# EAGLE board Drive_unit (EAGLE 9.6.2)
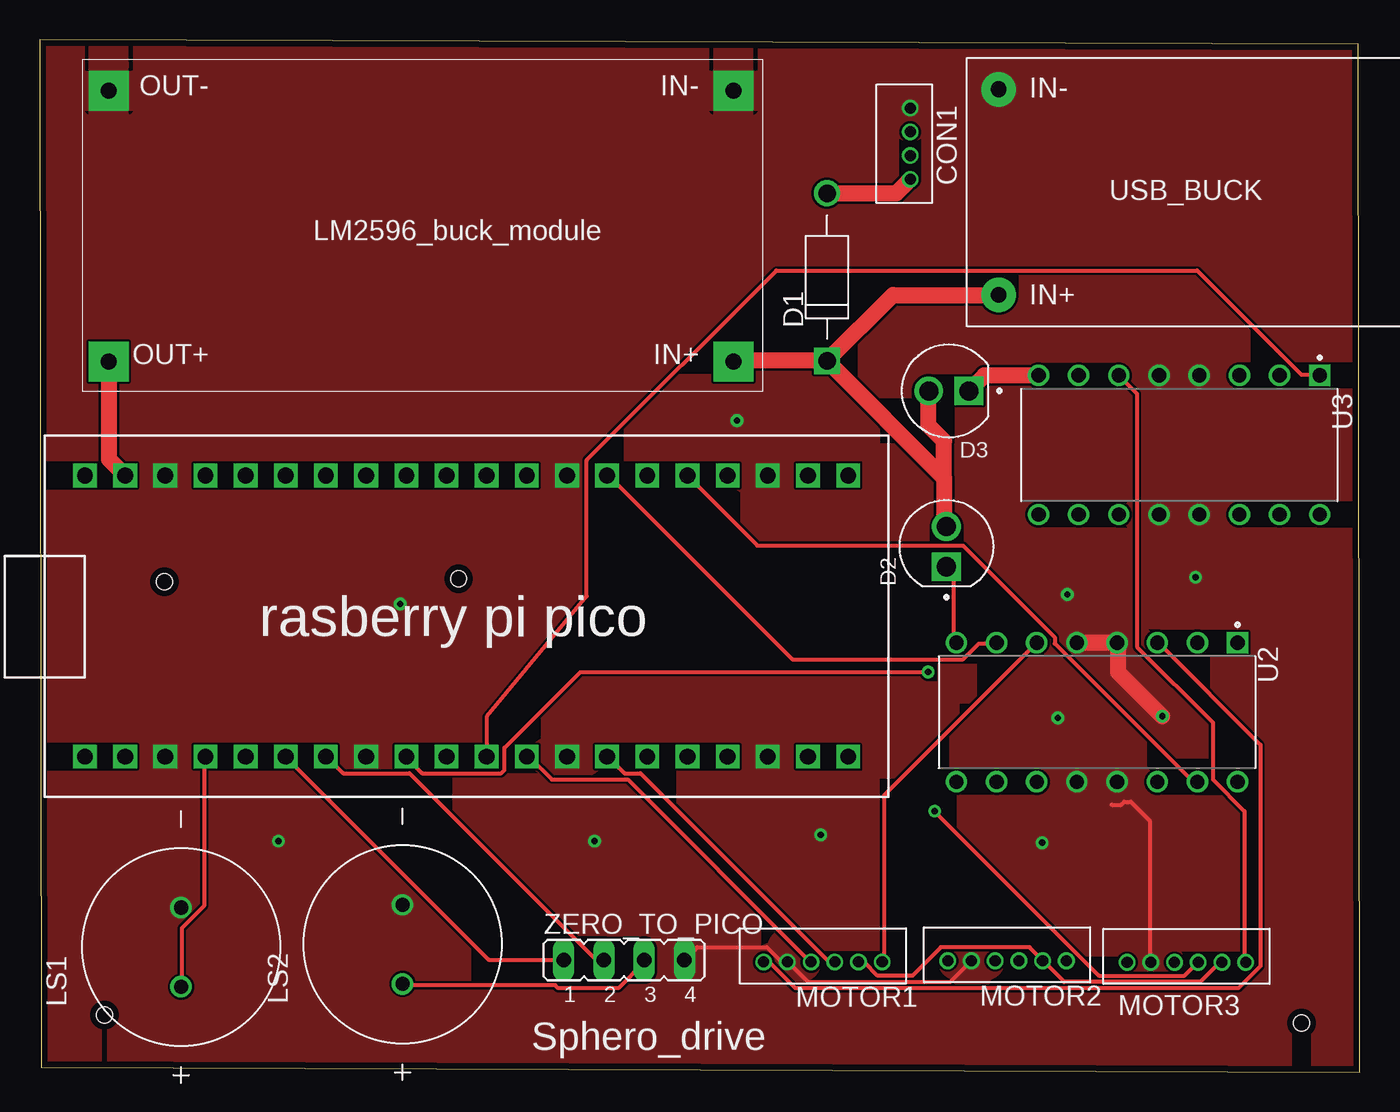
[diagram p0: board, top side]
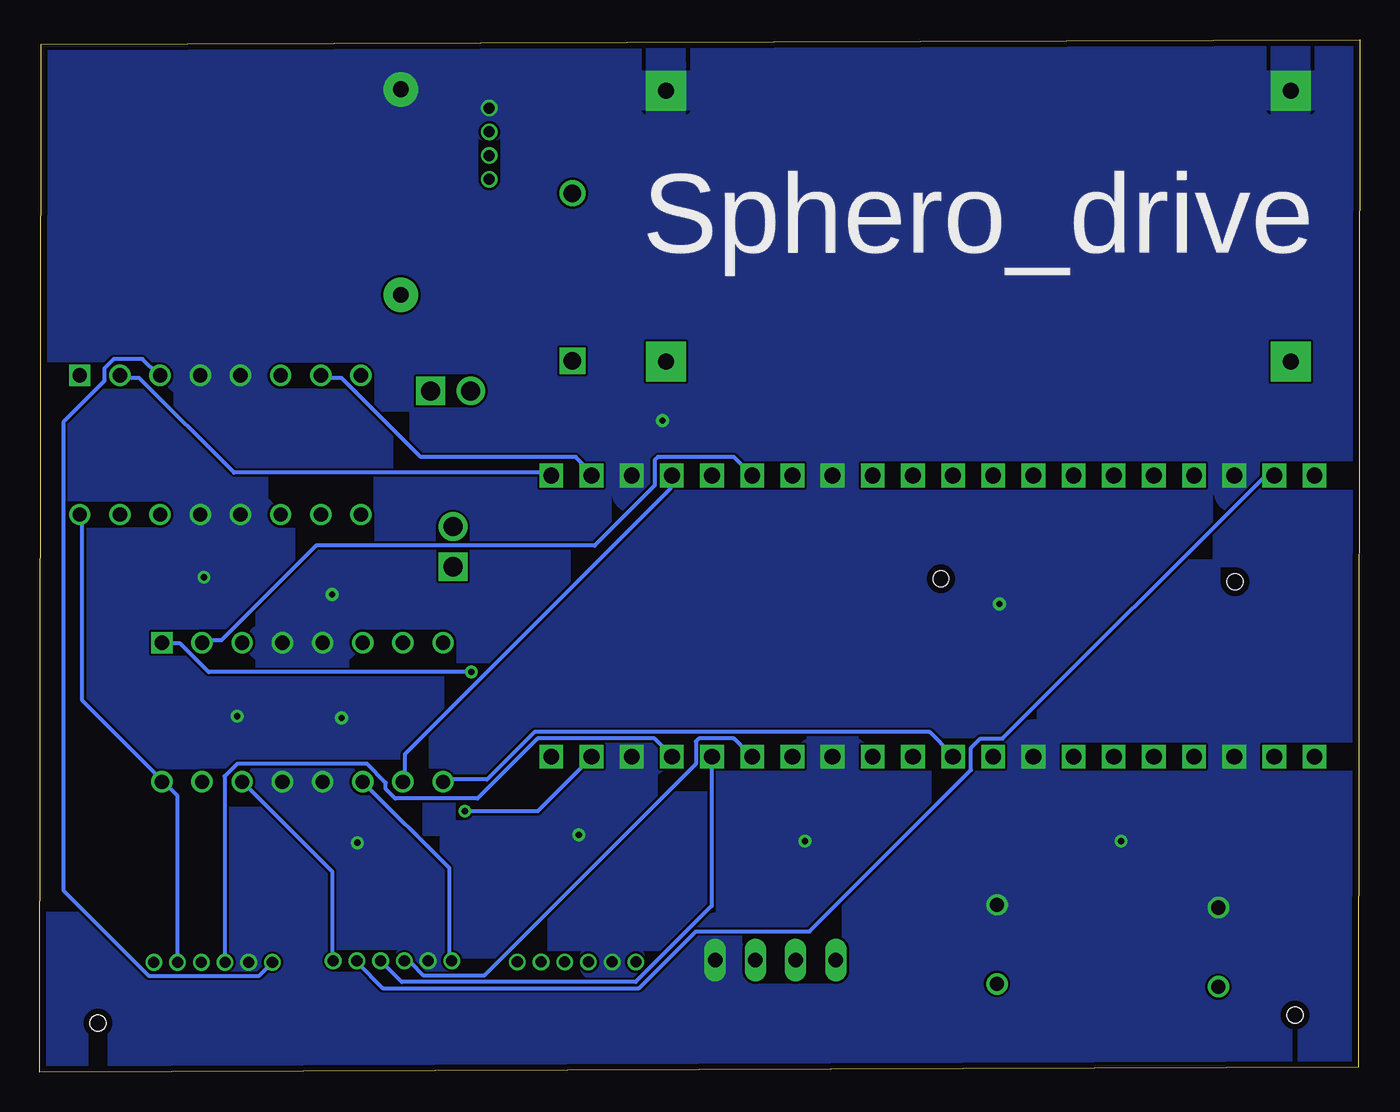
[diagram p1: board, bottom side, seen from below]

Size 83.5 x 65.3 mm. Coordinates in mm from the lower left corner, seen from the top.
Outline: 0.1,0.3 83.5,0 83.4,65 0,65.3 0.1,0.3
Copper layers (1*16): Top 0.035mm / dielectric 1.5mm / Bottom 0.035mm
Design rules "default *": minimum track width 0.25mm, minimum drill 0.4mm, track to track 0.15mm, track to pad 0.15mm, pad to pad 0.15mm, via to via 0.15mm, smd to smd 6mil, copper to edge 0.4mm, drill to drill 0.4mm, minimum pad ring 0.15mm, minimum via ring 8mil, stop-mask expansion 4mil, vias tented up to drill 0mil, thermal gap 10mil
Holes 1 mm at 7.9,31 26.5,31.2 79.8,3.1 4.1,3.6

## Footprints (pad centres in the part's own frame; a part is rotated, then mirrored left to right if it is on the bottom)
B4B-ZR = drill 0.7: 1 6,-1.3; 2 4.5,-1.3; 3 3,-1.3; 4 1.5,-1.3
DIOAD1060W80L520D270 = drill 1.1 pad 1.65: A 5.3,0 | drill 1.1 pad 1.65 square: C -5.3,0
LEDRD254W57D500H1070 = drill 1.21: A 1.27,0 | drill 1.21 square: C -1.27,0
XDCR_KPEG158-KS = drill 0.9: N 2.5,0; P -2.5,0
B6B-ZR = drill 0.7: 1 9,-1.3; 2 7.5,-1.3; 3 6,-1.3; 4 4.5,-1.3; 5 3,-1.3; 6 1.5,-1.3
RASPBERRY_PI_PICO = drill 1 square: 3V3 8.89,12.7; 3V3_EN 8.89,15.24; ADC_VREF 8.89,10.16; AGND 8.89,5.08; GND 8.89,17.78; GND2 8.89,-7.62; GND3 8.89,-20.32; GND4 -8.89,17.78; GND5 -8.89,5.08; GND6 -8.89,-7.62; GND7 -8.89,-20.32; GP0 -8.89,22.86; GP1 -8.89,20.32; GP2 -8.89,15.24; GP3 -8.89,12.7; GP4 -8.89,10.16; GP5 -8.89,7.62; GP6 -8.89,2.54; GP7 -8.89,0; GP8 -8.89,-2.54; GP9 -8.89,-5.08; GP10 -8.89,-10.16; GP11 -8.89,-12.7; GP12 -8.89,-15.24; GP13 -8.89,-17.78; GP14 -8.89,-22.86; GP15 -8.89,-25.4; GP16 8.89,-25.4; GP17 8.89,-22.86; GP18 8.89,-17.78; GP19 8.89,-15.24; GP20 8.89,-12.7; GP21 8.89,-10.16; GP22 8.89,-5.08; GP26_A0 8.89,0; GP27_A1 8.89,2.54; GP28_A2 8.89,7.62; RUN 8.89,-2.54; VBUS 8.89,22.86; VSYS 8.89,20.32
DIP880W50P254L2000H510Q16 = drill 0.9 pad 1.25 square: 1 -4.4,8.89 | drill 0.9 pad 1.25: 2 -4.4,6.35; 3 -4.4,3.81; 4 -4.4,1.27; 5 -4.4,-1.27; 6 -4.4,-3.81; 7 -4.4,-6.35; 8 -4.4,-8.89; 9 4.4,-8.89; 10 4.4,-6.35; 11 4.4,-3.81; 12 4.4,-1.27; 13 4.4,1.27; 14 4.4,3.81; 15 4.4,6.35; 16 4.4,8.89
USB_BUCK = drill 1 pad 2.184: IN+ 2,2; IN- 2,15
LM2596_MODULE = drill 1 pad 2.54 square: IN+ 1.841,19.113; IN- 1.841,1.968; OUT+ 41.339,19.113; OUT- 41.339,1.968
JP4 = drill 0.914 long: 1 -3.81,0; 2 -1.27,0; 3 1.27,0; 4 3.81,0

## Placement (x,y rotation side)
CON1  B4B-ZR  [B4B-ZR]  56.36,62.46 270 top
D1  1N4007  [DIOAD1060W80L520D270]  49.8,50.28 90 top
D2  L08R5000Q1  [LEDRD254W57D500H1070]  57.35,33.23 90 top
D3  L08R5000Q1  [LEDRD254W57D500H1070]  57.5,43.08 180 top
LS1  KPEG158-KS  [XDCR_KPEG158-KS]  8.95,7.9 90 top
LS2  KPEG158-KS  [XDCR_KPEG158-KS]  22.95,8.07 90 top
MOTOR1  B6B-ZR  [B6B-ZR]  54.79,5.66 180 top
MOTOR2  B6B-ZR  [B6B-ZR]  66.43,5.74 180 top
MOTOR3  B6B-ZR  [B6B-ZR]  77.77,5.64 180 top
U1  RASPBERRY_PI_PICO  [RASPBERRY_PI_PICO]  25.73,28.84 90 top
U2  L293D  [DIP880W50P254L2000H510Q16]  66.87,22.76 270 top
U3  L293D  [DIP880W50P254L2000H510Q16]  72.06,39.66 270 top
U$1  USB_BUCK  [USB_BUCK]  58.65,47.15 0 top
U$3  LM2596_BUCK_MODULE  [LM2596_MODULE]  45.72,64.04 180 top
ZERO_TO_PICO  [JP4]  36.96,7.09 0 top

## Library data of the parts
CON1 MOTOR1-MOTOR3 = jst
D1 = 1N4007; AVAILABILITY: In Stock; CHECK_PRICES: https://www.snapeda.com/parts/1N4007/Diotec/view-part/?ref=eda; DESCRIPTION: Diode, DO-41, 1000V, 1A, 175°C; MF: Diotec Semiconductor; MP: 1N4007; PACKAGE: DO-41 Diotec; PRICE: None; SNAPEDA_LINK: https://www.snapeda.com/parts/1N4007/Diotec/view-part/?ref=snap
D2 D3 = L08R5000Q1; AVAILABILITY: In Stock; CHECK_PRICES: https://www.snapeda.com/parts/L08R5000Q1/LED+Technology/view-part/?ref=eda; DESCRIPTION: LED, 5MM, ORANGE; LED / Lamp Size: 5mm / T-1 3/4; LED Colour: Orange; Typ Luminous Intensity: 4.3mcd; Viewing Angle: ...; MF: LED Technology; MP: L08R5000Q1; PACKAGE: None; PRICE: None; SNAPEDA_LINK: https://www.snapeda.com/parts/L08R5000Q1/LED+Technology/view-part/?ref=snap
LS1 LS2 = KPEG158-KS; AVAILABILITY: In Stock; CHECK_PRICES: https://www.snapeda.com/parts/KPEG158-KS/Kingstate/view-part/?ref=eda; DESCRIPTION: Piezo Transducer (Passive Buzzer), 4.0KHz, 85 dB (SPL), 12.5 dia.(Ø)/L, Width, 7.5 Height, Pin Type; MF: Kingstate; MP: KPEG158-KS; PACKAGE: None; PRICE: None; SNAPEDA_LINK: https://www.snapeda.com/parts/KPEG158-KS/Kingstate/view-part/?ref=snap
U1 = RASPBERRY_PI_PICO; AVAILABILITY: Not in stock; CHECK_PRICES: https://www.snapeda.com/parts/RASPBERRY%20PI%20PICO/Raspberry+Pi/view-part/?ref=eda; DESCRIPTION: Raspberry Pi Board, Arm Cortex-M0+; Core Architecture:Arm; Core Sub-Architecture:Cortex-M0+; Kit Contents:Raspberry Pi Pico Board; No. Of Bits:32Bit; Silicon Core Number:Rp2040; Silicon Manufacturer:Raspberry Pi |Raspberry-Pi RASPBERRY PI PICO; MF: Raspberry Pi; MP: RASPBERRY PI PICO; PACKAGE: None; PRICE: None; SNAPEDA_LINK: https://www.snapeda.com/parts/RASPBERRY%20PI%20PICO/Raspberry+Pi/view-part/?ref=snap
U2 U3 = L293D; AVAILABILITY: In Stock; CHECK_PRICES: https://www.snapeda.com/parts/L293D/STMicroelectronics/view-part/?ref=eda; DESCRIPTION: Bipolar Motor Driver - Parallel 16-PowerDIP; MF: STMicroelectronics; MP: L293D; PACKAGE: DIP-16 STMicroelectronics; PRICE: None; SNAPEDA_LINK: https://www.snapeda.com/parts/L293D/STMicroelectronics/view-part/?ref=snap
U$1 = USB_BUCK
U$3 = LM2596_module
ZERO_TO_PICO = jumper

## Nets
5V: MOTOR1.5 MOTOR2.5 MOTOR3.5 U1.VSYS U2.16 U3.16 U$3.OUT+
BAT+: D1.C D2.A D3.A U$1.IN+ U$3.IN+
BUZZ_1: LS1.P U1.GP2
BUZZ_2: LS2.P ZERO_TO_PICO.3
ENCA1: MOTOR1.3 U1.GP9
ENCA2: MOTOR2.3 U1.GP11
ENCA3: MOTOR3.3 U1.GP13
ENCB1: MOTOR1.4 U1.GP10
ENCB2: MOTOR2.4 U1.GP12
ENCB3: MOTOR3.4 U1.GP14
GND: CON1.4 LS1.N LS2.N MOTOR1.2 MOTOR2.2 MOTOR3.2 U1.GND U1.GND2 U1.GND3 U1.GND4 U1.GND5 U1.GND6 U1.GND7 U2.4 U2.5 U2.12 U2.13 U3.4 U3.5 U3.12 U3.13 U$1.IN- U$3.IN- U$3.OUT- ZERO_TO_PICO.4
IN11: U1.GP20 U2.2
IN12: U1.GP21 U2.7
IN21: U1.GP18 U2.10
IN22: U1.GP19 U2.15
IN31: U1.GP16 U3.2
IN32: U1.GP17 U3.7
M11: MOTOR1.1 U2.3
M12: MOTOR1.6 U2.6
M21: MOTOR2.1 U2.11
M22: MOTOR2.6 U2.14
M31: MOTOR3.1 U3.3
M32: MOTOR3.6 U3.6
N$1: CON1.1 D1.A
N$2: D2.C U2.8
N$21: D3.C U3.8
PWM1: U1.GP6 U2.1
PWM2: U1.GP7 U2.9
PWM3: U1.GP8 U3.1
UART_RX: U1.GP5 ZERO_TO_PICO.2
UART_TX: U1.GP4 ZERO_TO_PICO.1

## Tracks (layer width: path | path; a pad name or v marks a point on that pad's centre or on a via)
5V
  Top 0.25: MOTOR1.5 51.8,6.9 52.2,6.9 53,6.1 55.2,6.1 57,7.9 62.6,7.9 63.4,7.1 MOTOR2.5 63.6,6.9 64.8,5.7 73.4,5.7 74.6,6.9 MOTOR3.5
  Top 1.016: U$3.OUT+ 4.38,38.76 U1.VSYS
  Bottom 0.25: MOTOR3.5 74.8,7.1 74.8,17.5 75.6,18.3 U2.16 75.8,18.5 80.8,23.5 80.8,35.1 U3.16 | U1.VSYS 5.6,37.7 6,37.7 22.6,21.1 24,21.1 24.6,20.5 24.6,19.1 34.8,8.9 42,8.9 45.6,5.3 61.8,5.3 63.4,6.9 MOTOR2.5
BAT+
  Top 1.016: D1.C 43.93,44.98 U$3.IN+ | D1.C 53.97,49.15 U$1.IN+ | D1.C 57.2,37.58 | D2.A 57.2,34.65 57.2,37.58 | D3.A 56.2,43.11 56.2,40.9 57.2,39.9 57.2,37.58
BUZZ_1
  Top 0.25: LS1.P 9,5.5 9,9.1 10.4,10.5 10.4,19.9 U1.GP2
BUZZ_2
  Top 0.25: LS2.P 23,5.5 32.6,5.5 32.8,5.3 36.6,5.3 38.2,6.9 ZERO_TO_PICO.3
ENCA1
  Top 0.25: MOTOR1.3 48.6,7.1 37.2,18.5 32.4,18.5 31,19.9 U1.GP9
ENCA2
  Bottom 0.25: MOTOR2.3 60.4,6.9 60,6.9 59.2,6.1 55.4,6.1 42,19.5 42,20.9 41.8,21.1 39.6,21.1 38.6,20.1 U1.GP11
ENCA3
  Bottom 0.25: MOTOR3.3 71.8,7.1 71.8,18.7 71,19.5 62.8,19.5 61.6,18.3 61.6,17.9 61,17.3 55.8,17.3 52,21.1 44.6,21.1 43.6,20.1 U1.GP13
ENCB1
  Top 0.25: MOTOR1.4 50.2,7.1 49.8,7.1 38,18.9 37,18.9 36,19.9 U1.GP10
ENCB2
  Bottom 0.25: MOTOR2.4 61.8,6.9 60.6,5.7 45.8,5.7 41,10.5 41,19.9 U1.GP12
ENCB3  (via drill 0.4)
  Top 0.25: v56.6,16.5 67,6.1 72.4,6.1 73.2,6.9 MOTOR3.4
  Bottom 0.25: v56.6,16.5 52,16.5 48.6,19.9 U1.GP14
GND  (via drill 0.4)
  Top 0.25: ZERO_TO_PICO.4 40.8,7.1 41.6,7.9 46,7.9 46.8,7.1 47.2,7.1 MOTOR1.2 47.4,6.9 48.6,5.7 57.6,5.7 58.8,6.9 MOTOR2.2 | 67.8,16.9 68.4,16.9 68.6,17.1 69,17.1 70.2,15.9 70.2,7.1 MOTOR3.2
  Top 1.016: U2.5 U2.4 68.2,27.1 68.2,25.3 v71,22.5
  other vias: 22.8,29.6 15.1,14.6 35.1,14.6 49.4,15 63.4,14.5 65,30.2 73.1,31.3 64.4,22.4 44.1,41.2
  pour Top: -5.7,59.7 -5.7,-0.2 -1.2,-4.7 88.6,-4.7 88.8,-4.5 88.8,65.1 85.4,68.5 2.7,68.5 -6.2,59.6
  pour Bottom: -9.3,58.3 -9.3,-5.1 -3,-11.4 90.4,-11.4 91.8,-10 96.6,-5.2 96.6,69.7 91.7,74.6 1.3,74.6 -9.3,64 -9.3,58.7
IN11
  Bottom 0.25: U2.2 73.2,27.3 72,27.3 66,33.3 48.4,33.3 44.6,37.1 44.6,38.7 44.4,38.9 39.6,38.9 38.6,37.9 U1.GP20
IN12
  Top 0.25: U2.7 60.4,27.1 59.4,27.1 58.4,26.1 47.6,26.1 36,37.7 U1.GP21
IN21
  Bottom 0.25: U2.10 60.4,18.5 60.4,20.1 43.6,36.9 43.6,37.7 U1.GP18
IN22
  Top 0.25: U2.15 73.2,18.5 72.8,18.5 64.2,27.1 64.2,27.5 58.4,33.3 45.4,33.3 41,37.7 U1.GP19
IN31
  Bottom 0.25: U3.2 78.4,43.9 77.2,43.9 71.2,37.9 51.2,37.9 U1.GP16
IN32
  Bottom 0.25: U3.7 65.6,43.9 64.4,43.9 59.4,38.9 49.6,38.9 48.6,37.9 U1.GP17
M11
  Top 0.25: MOTOR1.1 45.8,6.9 46.2,6.9 47.8,5.3 75.8,5.3 77.2,6.7 77.2,20.7 70.8,27.1 U2.3
M12
  Top 0.25: MOTOR1.6 53.4,7.1 53.4,17.5 63,27.1 U2.6
M21
  Bottom 0.25: MOTOR2.1 57.6,7.1 57.6,12.9 63,18.3 U2.11
M22
  Bottom 0.25: MOTOR2.6 65,7.1 65,12.7 70.6,18.3 U2.14
M31
  Bottom 0.25: MOTOR3.1 68.8,6.9 69.6,6.1 76.6,6.1 82,11.5 82,41.1 79.4,43.7 79.4,44.5 78.8,45.1 77,45.1 76,44.1 U3.3
M32
  Top 0.25: MOTOR3.6 76.2,7.1 76.2,16.5 74.2,18.5 74.2,22.1 69.4,26.9 69.4,42.9 68.4,43.9 U3.6
N$1
  Top 1.016: D1.A 54.18,55.58 CON1.1
N$2
  Top 0.25: U2.8 57.8,27.3 57.8,31.5 57.4,31.9 D2.C
N$21
  Top 1.016: U3.8 59.75,44.06 D3.C
PWM1  (via drill 0.4)
  Top 0.25: v56.2,25.3 34.2,25.3 29.4,20.5 29.4,19.1 29.2,18.9 24.2,18.9 23.2,19.9 U1.GP6
  Bottom 0.25: v56.2,25.3 72.8,25.3 74.6,27.1 75.6,27.1 U2.1
PWM2
  Bottom 0.25: U2.9 57.8,18.5 55.2,18.5 52.2,21.5 27.2,21.5 25.8,20.1 U1.GP7
PWM3
  Top 0.25: U3.1 80.8,44.1 79.8,44.1 73.2,50.7 46.6,50.7 34.6,38.7 34.6,30.1 28.27,22.49 U1.GP8
UART_RX
  Top 0.25: ZERO_TO_PICO.2 35.6,7.1 35.2,7.1 23.4,18.9 19.2,18.9 18.2,19.9 U1.GP5
UART_TX
  Top 0.25: ZERO_TO_PICO.1 33,7.1 28.4,7.1 15.6,19.9 U1.GP4

## Text on the board
tPlace: Sphero_drive
bPlace: Sphero_drive